# EAGLE board Rain-Kamm-024 (EAGLE 7.3.0)
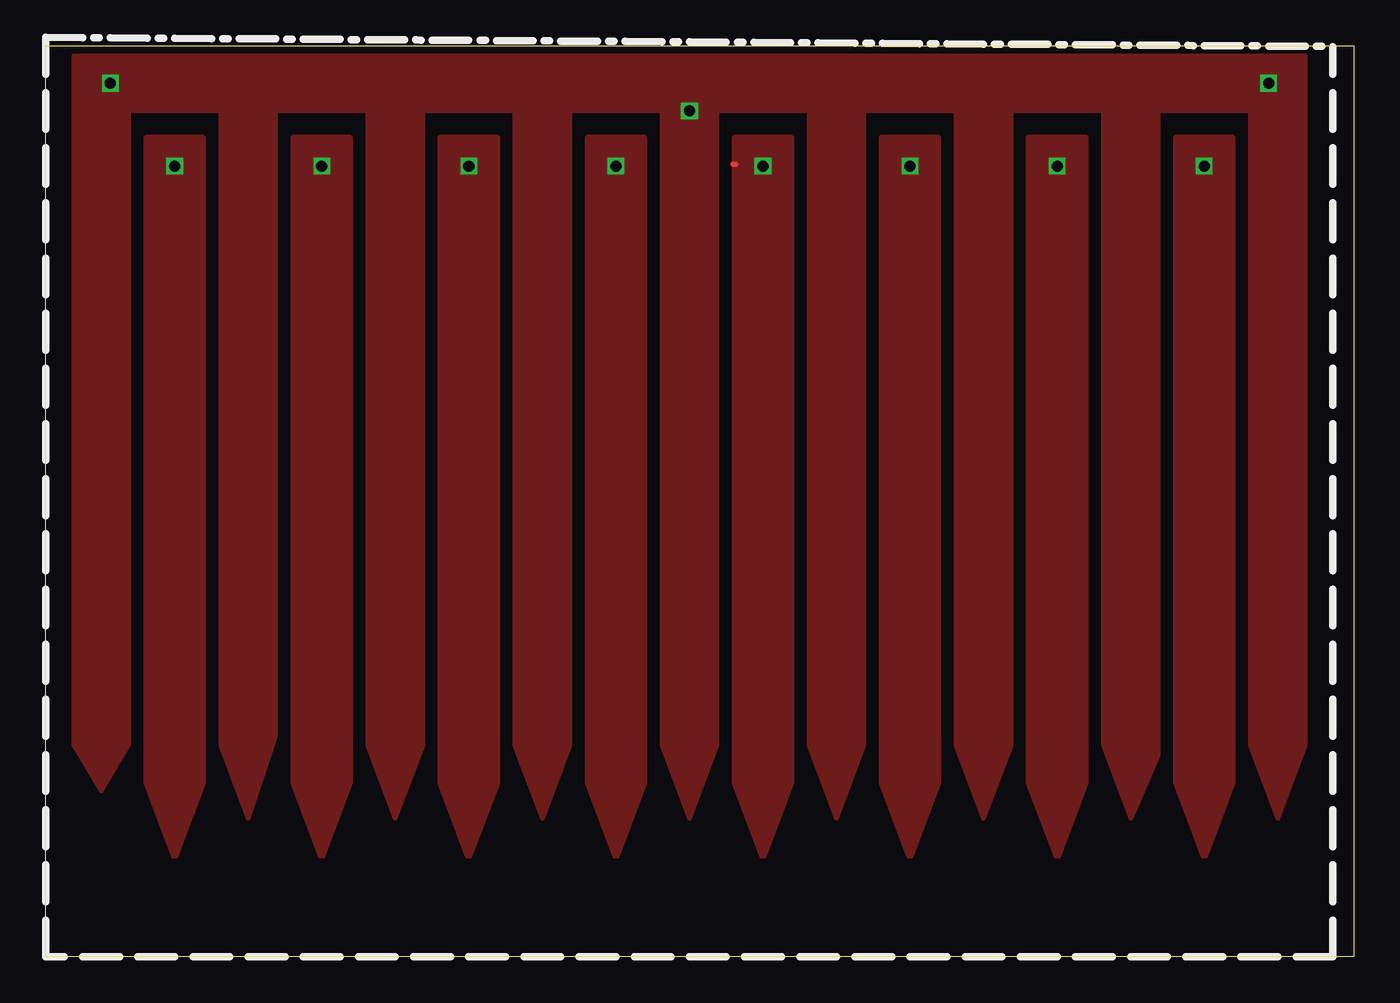
[diagram p0: board, top side]
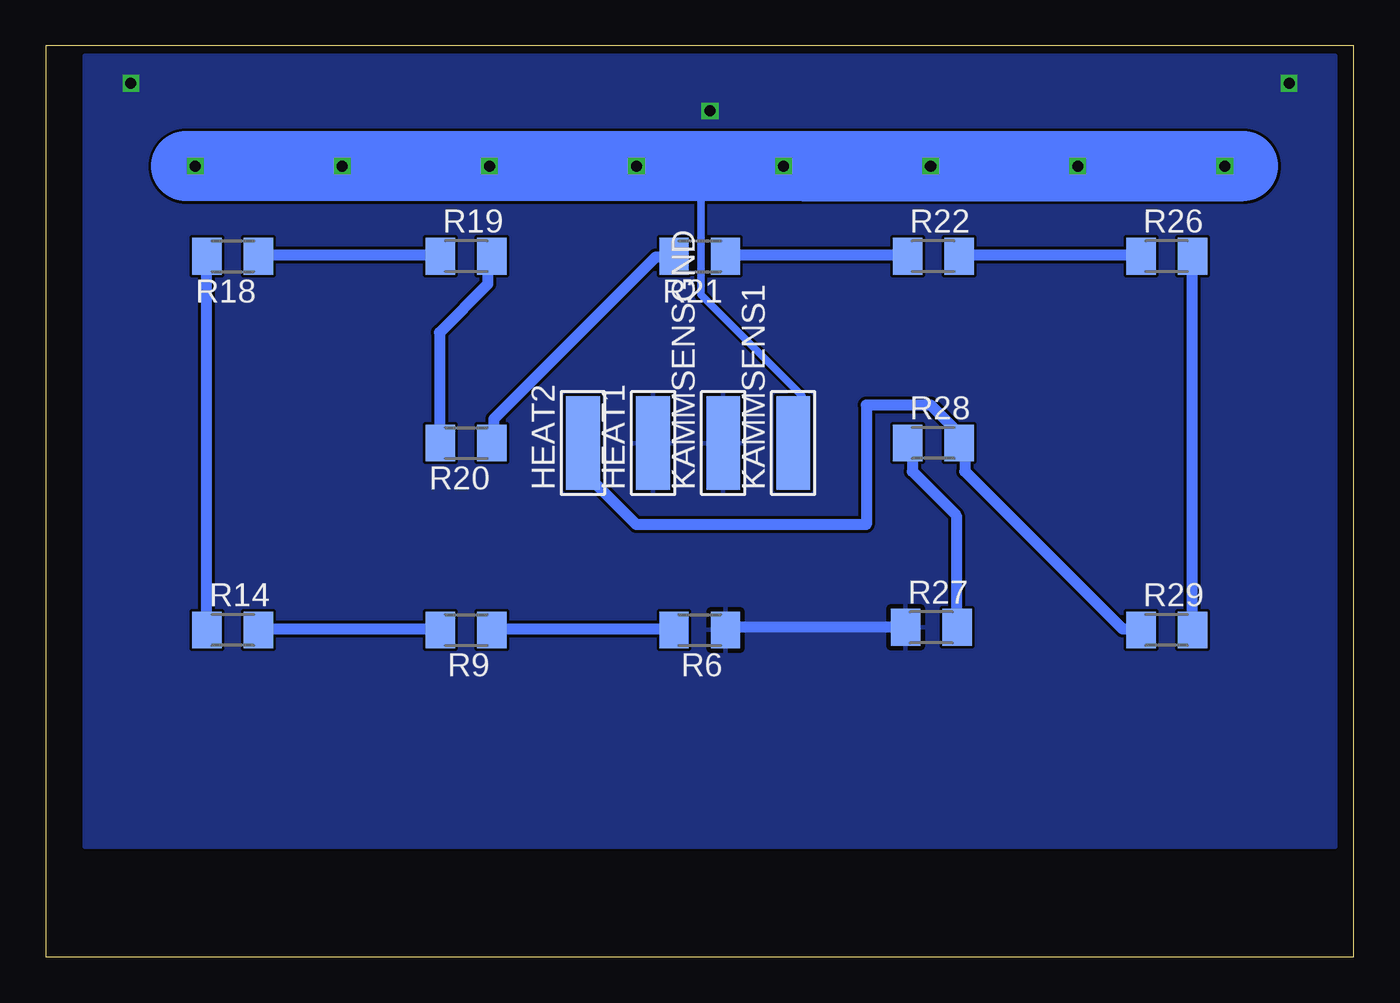
[diagram p1: board, bottom side, seen from below]

Size 71.12 x 49.53 mm. Coordinates in mm from the lower left corner, seen from the top.
Outline: 0,0 0,49.53 69.85,49.53 71.12,49.53 71.12,0 0,0
Copper layers (1*16): Top 0.035mm / dielectric 1.5mm / Bottom 0.035mm
Design rules "SeeedStudio_2layer_DRU_no_angle_20140221": minimum track width 6mil, minimum drill 12mil, track to track 6mil, track to pad 6mil, pad to pad 6mil, via to via 6mil, smd to smd 0mil, copper to edge 10mil, drill to drill 10mil, minimum pad ring 10mil, minimum via ring 6mil, stop-mask expansion 2mil, vias tented up to drill 100mil, thermal gap 10mil
Net classes: 0 default: width 0.305 mm; 1 PWR: width 0.61 mm

## Footprints (pad centres in the part's own frame; a part is rotated, then mirrored left to right if it is on the bottom)
5-1,8 = smd 1.829 x 5.08: 1 0,0
M1206 = smd 1.6 x 2: 1 -1.4,0; 2 1.4,0

## Placement (x,y rotation side)
HEAT1  WIREPADSMD5-1,8  [5-1,8]  38.1,27.94 0 bottom
HEAT2  WIREPADSMD5-1,8  [5-1,8]  41.91,27.94 0 bottom
KAMMSENS1  WIREPADSMD5-1,8  [5-1,8]  30.48,27.94 0 bottom
KAMMSENSGND  WIREPADSMD5-1,8  [5-1,8]  34.29,27.94 0 bottom
R6  [M1206]  35.56,17.78 180 bottom
R9  [M1206]  48.26,17.78 180 bottom
R14  [M1206]  60.96,17.78 0 bottom
R18  [M1206]  60.96,38.1 180 bottom
R19  [M1206]  48.26,38.1 0 bottom
R20  [M1206]  48.26,27.94 180 bottom
R21  [M1206]  35.56,38.1 180 bottom
R22  [M1206]  22.86,38.1 0 bottom
R26  [M1206]  10.16,38.1 0 bottom
R27  [M1206]  22.96,17.92 0 bottom
R28  [M1206]  22.86,27.94 0 bottom
R29  [M1206]  10.16,17.78 0 bottom

## Library data of the parts
HEAT1 HEAT2 KAMMSENS1 KAMMSENSGND = wirepad
R6 R9 R14 R18-R22 R26-R29 = rcl

## Nets
+12V [PWR]: HEAT2.1 R28.2 R29.1
GND: HEAT1.1 KAMMSENSGND.1 R6.1 R27.1
KAMMSENS: KAMMSENS1.1
N$1 [PWR]: R20.1 R21.2
N$2 [PWR]: R9.2 R14.2
N$3 [PWR]: R14.1 R18.2
N$4 [PWR]: R18.1 R19.1
N$6 [PWR]: R19.2 R20.2
N$7 [PWR]: R6.2 R9.1
N$9 [PWR]: R21.1 R22.1
N$10 [PWR]: R22.2 R26.1
N$11 [PWR]: R26.2 R29.2
N$13 [PWR]: R27.2 R28.1

## Tracks (layer width: path | path; a pad name or v marks a point on that pad's centre or on a via)
+12V
  Bottom 0.61: R29.1 11.66,17.83 12.57,17.83 21.14,26.4 21.14,27.66 21.37,27.89 R28.2 21.46,28.46 23,30 26.5,30 26.5,23.5 39,23.5 41.5,26 41.5,27.53 HEAT2.1
GND  (via drill 0.6)
  Bottom 0.61: R27.1 24.46,17.95 33.95,17.95 34.06,17.83 R6.1
  other vias: 3.5,47.5 66.5,47.5 35,46
  pour Bottom: 1,49 69,49 69,6 1,6
  pour Top: 3,9 1.5,11.5 1.5,49 68.5,49 68.5,11.5 67,7.5 65.5,11.5 65.5,46 60.5,46 60.5,11 59,7.5 57.5,11.5 57.5,46 52.5,46 52.5,11.5 51,7.5 49.5,11.5 49.5,46 44.5,46 44.5,11.5 43,7.5 41.5,11.5 41.5,46 36.5,46 36.5,11.5 35,7.5 33.5,11.5 33.5,46 28.5,46 28.5,11.5 27,7.5 25.5,11.5 25.5,46 20.5,46 20.5,11.5 19,7.5 17.5,11.5 17.5,46 12.5,46 12.5,12 11,7.5 9.5,11.5 9.5,46 4.5,46 4.5,11.5
KAMMSENS  (via drill 0.6)
  Top 0.305: 37.38,43.09 37.5,43.09
  Bottom 0.305: v39,43 39.09,43.09 39.09,43 | KAMMSENS1.1 30.4,28 30.18,28 30,28 | v55,43 55.09,43.09 55.09,43 | v63,43 63.09,43.09 63.09,43
  Bottom 0.406: 30.5,27.5 30,27.5 30,28 30,30.5 35.5,36 35.5,43 | v7,43 v15,43 | v23,43 v31,43 | v39,43 v47,43
  Bottom 3.81: 30,43 v23,43 | v23,43 v15,43 | v15,43 v7,43 | v7,43 6,43 v7,43 | v7,43 v15,43 | v15,43 v23,43 | v23,43 v31,43 35.5,43 v39,43 39.09,43 v47,43 v55,43 55.09,43 v63,43 63.09,43 63.5,43
  pour Top: 5.5,44.5 8.5,44.5 8.5,9.5 7,5.5 5.5,9.5
  pour Top: 13.5,44.5 16.5,44.5 16.5,9.5 15,5.5 13.5,9.5
  pour Top: 21.5,44.5 24.5,44.5 24.5,9.5 23,5.5 21.5,9.5
  pour Top: 29.5,44.5 32.5,44.5 32.5,9.5 31,5.5 29.5,9.5
  pour Top: 37.5,44.5 40.5,44.5 40.5,9.5 39,5.5 37.5,9.5
  pour Top: 45.5,44.5 48.5,44.5 48.5,9.5 47,5.5 45.5,9.5
  pour Top: 53.5,44.5 56.5,44.5 56.5,9.5 55,5.5 53.5,9.5
  pour Top: 61.5,44.5 64.5,44.5 64.5,9.5 63,5.5 61.5,9.5
N$1
  Bottom 0.61: R21.2 37.03,38.06 37.95,38.06 46.75,29.26 46.75,28 R20.1
N$2
  Bottom 0.61: R9.2 49.72,17.83 59.55,17.83 R14.2
N$3
  Bottom 0.61: R14.1 62.41,17.83 62.41,38.06 R18.2
N$4
  Bottom 0.61: R19.1 49.72,38.18 59.55,38.18 R18.1
N$6
  Bottom 0.61: R20.2 49.72,28 49.72,33.95 47.09,36.58 47.09,37.83 46.86,38.06 R19.2
N$7
  Bottom 0.61: R6.2 37.03,17.83 46.75,17.83 R9.1
N$9
  Bottom 0.61: R22.1 24.35,38.18 34.06,38.18 R21.1
N$10
  Bottom 0.61: R26.1 11.66,38.18 21.37,38.18 R22.2
N$11
  Bottom 0.61: R29.2 8.8,17.83 8.8,38.06 R26.2
N$13
  Bottom 0.61: R27.2 21.6,17.95 21.6,24 24,26.4 24,27.66 24.23,27.89 R28.1